# EAGLE board CT_schematic (EAGLE 7.6.0)

Size 100 x 80 mm. Coordinates in mm from the lower left corner, seen from the top.
Outline: 0,0 100,0 100,80 0,80 0,0
Copper layers (1*16): Top 0.035mm / dielectric 1.5mm / Bottom 0.035mm
Design rules "default": minimum track width 10mil, minimum drill 24mil, track to track 8mil, track to pad 8mil, pad to pad 8mil, via to via 8mil, smd to smd 8mil, copper to edge 40mil, drill to drill 8mil, minimum pad ring 10mil, minimum via ring 8mil, stop-mask expansion 4mil, vias tented up to drill 0mil, thermal gap 10mil

## Footprints (pad centres in the part's own frame; a part is rotated, then mirrored left to right if it is on the bottom)
C0603 = smd 0.8 x 0.8: 1 -0.762,0; 2 0.762,0
C0402 = smd 0.5 x 0.5: 1 -0.508,0; 2 0.508,0
C1210 = smd 1.2 x 2.5: 1 -1.524,0; 2 1.524,0
EXV-9H = smd 3.505 x 1.676: 1 -2.857,0; 2 2.857,0
L0603 = smd 0.8 x 0.8: 1 -0.762,0; 2 0.762,0
PJ-037B_PACKAGE = drill 3.7 square: 1 12,0 | drill 3.2 square: 2 6,0
R0603 = smd 0.8 x 0.8: 1 -0.762,0; 2 0.762,0
LQFP48 = smd 0.3 x 1.2: 1 -2.75,-4.25; 2 -2.25,-4.25; 3 -1.75,-4.25; 4 -1.25,-4.25; 5 -0.75,-4.25; 6 -0.25,-4.25; 7 0.25,-4.25; 8 0.75,-4.25; 9 1.25,-4.25; 10 1.75,-4.25; 11 2.25,-4.25; 12 2.75,-4.25; 25 2.75,4.25; 26 2.25,4.25; 27 1.75,4.25; 28 1.25,4.25; 29 0.75,4.25; 30 0.25,4.25; 31 -0.25,4.25; 32 -0.75,4.25; 33 -1.25,4.25; 34 -1.75,4.25; 35 -2.25,4.25; 36 -2.75,4.25 | smd 1.2 x 0.3: 13 4.25,-2.75; 14 4.25,-2.25; 15 4.25,-1.75; 16 4.25,-1.25; 17 4.25,-0.75; 18 4.25,-0.25; 19 4.25,0.25; 20 4.25,0.75; 21 4.25,1.25; 22 4.25,1.75; 23 4.25,2.25; 24 4.25,2.75; 37 -4.25,2.75; 38 -4.25,2.25; 39 -4.25,1.75; 40 -4.25,1.25; 41 -4.25,0.75; 42 -4.25,0.25; 43 -4.25,-0.25; 44 -4.25,-0.75; 45 -4.25,-1.25; 46 -4.25,-1.75; 47 -4.25,-2.25; 48 -4.25,-2.75
SOIC-8 = smd 1.6 x 0.6: 1 -2.7,1.905 | smd 1.55 x 0.6: 2 -2.7,0.635; 3 -2.7,-0.635; 4 -2.7,-1.905; 5 2.7,-1.905; 6 2.7,-0.635; 7 2.7,0.635; 8 2.7,1.905
LGA63S127P16X13_2050X1750X150 = smd 0.9 x 0.9: 1 -9.525,-8.05; 2 -8.255,-8.05; 3 -6.985,-8.05; 4 -5.715,-8.05; 5 -4.445,-8.05; 6 -3.175,-8.05; 7 -1.905,-8.05; 8 -0.635,-8.05; 9 0.635,-8.05; 10 1.905,-8.05; 11 3.175,-8.05; 12 4.445,-8.05; 13 5.715,-8.05; 14 6.985,-8.05; 15 8.255,-8.05; 16 9.525,-8.05; 17 9.525,-6.35; 18 9.525,-5.08; 19 9.525,-3.81; 20 9.525,-2.54; 21 9.525,-1.27; 22 9.525,0; 23 9.525,1.27; 24 9.525,2.54; 25 9.525,3.81; 26 9.525,5.08; 27 9.525,6.35; 28 9.525,8.05; 29 8.255,8.05; 30 6.985,8.05; 31 5.715,8.05; 32 4.445,8.05; 33 3.175,8.05; 34 1.905,8.05; 35 0.635,8.05; 36 -0.635,8.05; 37 -1.905,8.05; 38 -3.175,8.05; 39 -4.445,8.05; 40 -5.715,8.05; 41 -6.985,8.05; 42 -8.255,8.05; 43 -9.525,8.05; 44 -9.525,6.35; 45 -9.525,5.08; 46 -9.525,3.81; 47 -9.525,2.54; 48 -9.525,1.27; 49 -9.525,0; 50 -9.525,-1.27; 51 -9.525,-2.54; 52 -9.525,-3.81; 53 -9.525,-5.08; 54 -9.525,-6.35 | smd 2.2 x 2.2: 55 -4.5,-4.5; 56 -1.5,-4.5; 57 1.5,-4.5; 58 -4.5,-1.5; 59 -1.5,-1.5; 60 1.5,-1.5; 61 -4.5,1.5; 62 -1.5,1.5; 63 1.5,1.5
COAXIAL_C = smd 1 x 1: 1 0,-1.5; 2 0,1.5 | smd 1.05 x 2.2: 3 -1.475,0; 4 1.475,0
SAMTEC_FTSH-105-01-L-DV-K = smd 0.762 x 2.794: 1 -2.54,-2.032; 2 -2.54,2.032; 3 -1.27,-2.032; 4 -1.27,2.032; 5 0,-2.032; 6 0,2.032; 7 1.27,-2.032; 8 1.27,2.032; 9 2.54,-2.032; 10 2.54,2.032
MICRO_USB_AB = smd 0.4 x 1.35: 1 1.3,0.26; 2 0.65,0.26; 3 0,0.26; 4 -0.65,0.26; 5 -1.3,0.26 | drill 0.6 pad 0.95 long: 6 4.175,-2.54; 7 -4.175,-2.54 | drill 0.7 pad 1.1 long: 8 -2.225,0.46; 9 2.225,0.46
SOT143B = smd 1 x 0.7: 1 -0.75,-1 | smd 0.6 x 0.7: 2 0.95,-1; 3 0.95,1; 4 -0.95,1
ABS07-32.768KHZ-7-T = smd 1.1 x 2.4: 1 -2.5,0; 2 0,0
ABLS-25.000MHZ-B2F-T = smd 5.6 x 2.8: 1 -3.81,0; 2 5.69,0
WSON-8 = smd 0.3 x 0.6: 1 -0.75,0; 2 0.05,0; 3 0.85,0; 4 1.65,0; 5 1.65,3.8; 6 0.85,3.8; 7 0.05,3.8; 8 -0.75,3.8 | smd 3 x 2.6: PAD 0.45,1.9
SON-6 = smd 0.55 x 0.3: 1 -0.355,0.5 | smd 0.52 x 0.3: 2 -0.37,0; 3 -0.37,-0.5; 4 0.37,-0.5; 5 0.37,0; 6 0.37,0.5
SW_4-1437565-2 = smd 1.4 x 2.1: 1 -2.23,4.55; 2 -2.23,-4.55; 3 2.23,4.55; 4 2.23,-4.55
LGM67K-G1J2-24-Z = smd 0.8 x 1.4: A -2,0; C 0,0
NC7SZ125M5X = smd 1.3 x 0.7: 1 -1.3,0.95; 2 -1.3,0; 3 -1.3,-0.95; 4 1.3,-0.95; 5 1.3,0.95

## Placement (x,y rotation side)
C1  1e-07  [C0603]  -33.02,72.39 0 top  (outside the outline)
C2  1e-07  [C0603]  -36.83,72.39 0 top  (outside the outline)
C3  1e-07  [C0603]  -40.64,72.39 0 top  (outside the outline)
C4  1e-07  [C0603]  -44.45,72.39 0 top  (outside the outline)
C5  4.7e-06  [C0603]  -29.21,72.39 0 top  (outside the outline)
C6  1e-07  [C0603]  -48.26,72.39 0 top  (outside the outline)
C7  1e-08  [C0603]  -52.07,72.39 0 top  (outside the outline)
C8  1e-06  [C0603]  -55.88,72.39 0 top  (outside the outline)
C9  1e-11  [C0402]  -50.8,77.47 0 top  (outside the outline)
C10  1e-11  [C0402]  -54.61,77.47 0 top  (outside the outline)
C11  1e-11  [C0402]  -58.42,77.47 0 top  (outside the outline)
C12  1e-11  [C0402]  -62.23,77.47 0 top  (outside the outline)
C13  1e-08  [C0402]  -66.04,77.47 0 top  (outside the outline)
C14  1e-12  [C0402]  -69.85,77.47 0 top  (outside the outline)
C15  2.2e-05  [C1210]  -48.26,59.69 0 top  (outside the outline)
C16  1e-07  [C0402]  -73.66,77.47 0 top  (outside the outline)
C17  1e-07  [C0402]  -15.24,82.55 0 top  (outside the outline)
C18  1e-07  [C0402]  -19.05,82.55 0 top  (outside the outline)
C19  1e-08  [C0402]  -22.86,82.55 0 top  (outside the outline)
C20  1e-05  [C1210]  -54.61,59.69 0 top  (outside the outline)
C21  1e-05  [C1210]  -60.96,59.69 0 top  (outside the outline)
C22  1e-07  [C0402]  -26.67,82.55 0 top  (outside the outline)
C23  0.0001  [EXV-9H]  -29.21,50.8 0 top  (outside the outline)
C24  0.0001  [EXV-9H]  -40.64,50.8 0 top  (outside the outline)
C25  1e-08  [C0402]  -30.48,82.55 0 top  (outside the outline)
C26  1e-08  [C0402]  -34.29,82.55 0 top  (outside the outline)
C27  1e-08  [C0402]  -38.1,82.55 0 top  (outside the outline)
F1  240.0  [L0603]  -59.69,72.39 0 top  (outside the outline)
I1  3.6e-09  [C0402]  -46.99,77.47 0 top  (outside the outline)
J1  PJ-037B  [PJ-037B_PACKAGE]  -27.94,29.21 0 top  (outside the outline)
R1  10000.0  [R0603]  -41.91,66.04 0 top  (outside the outline)
R2  1000.0  [R0603]  -63.5,72.39 0 top  (outside the outline)
R3  1600.5  [R0603]  -67.31,72.39 0 top  (outside the outline)
R4  4700.0  [R0603]  -71.12,72.39 0 top  (outside the outline)
R5  4700.0  [R0603]  -15.24,77.47 0 top  (outside the outline)
R6  2200.0  [R0603]  -19.05,77.47 0 top  (outside the outline)
R7  2200.0  [R0603]  -22.86,77.47 0 top  (outside the outline)
R8  10000.0  [R0603]  -46.99,66.04 0 top  (outside the outline)
R9  10000.0  [R0603]  -52.07,66.04 0 top  (outside the outline)
R10  10000.0  [R0603]  -57.15,66.04 0 top  (outside the outline)
R11  10000.0  [R0603]  -62.23,66.04 0 top  (outside the outline)
R12  100000.0  [R0603]  -21.59,66.04 0 top  (outside the outline)
R13  2700.0  [R0603]  -26.67,77.47 0 top  (outside the outline)
R14  10000.0  [R0603]  -67.31,66.04 0 top  (outside the outline)
R15  10000.0  [R0603]  -72.39,66.04 0 top  (outside the outline)
R16  10000.0  [R0603]  -15.24,72.39 0 top  (outside the outline)
R17  5.0  [R0603]  -30.48,77.47 0 top  (outside the outline)
R18  100000.0  [R0603]  -26.67,66.04 0 top  (outside the outline)
R19  2231.0  [R0603]  -34.29,77.47 0 top  (outside the outline)
R20  1000.0  [R0603]  -38.1,77.47 0 top  (outside the outline)
R21  10000.0  [R0603]  -20.32,72.39 0 top  (outside the outline)
R22  10000.0  [R0603]  -25.4,72.39 0 top  (outside the outline)
R23  9100.0  [R0603]  -41.91,77.47 0 top  (outside the outline)
R24  680000.0  [R0603]  -31.75,66.04 0 top  (outside the outline)
R25  120000.0  [R0603]  -36.83,66.04 0 top  (outside the outline)
U1  STM32L151C6T6A  [LQFP48]  -25.4,41.91 0 top  (outside the outline)
U2  AT25128B-SSHL-T  [SOIC-8]  -41.91,40.64 0 top  (outside the outline)
U3  CC3200MODR1M2AMOBT  [LGA63S127P16X13_2050X1750X150]  -25.4,11.43 0 top  (outside the outline)
U4  73412-0114  [COAXIAL_C]  -21.59,52.07 0 top  (outside the outline)
U5  FTSH-105-01-L-DV-K  [SAMTEC_FTSH-105-01-L-DV-K]  -60.96,7.62 0 top  (outside the outline)
U6  47590-0001  [MICRO_USB_AB]  -36.83,30.48 0 top  (outside the outline)
U7  prtr5v0u2ax  [SOT143B]  -50.8,82.55 0 top  (outside the outline)
U8  ABS07-32.768KHZ-7-T  [ABS07-32.768KHZ-7-T]  -27.94,59.69 0 top  (outside the outline)
U9  ABLS-25.000MHZ-B2F-T  [ABLS-25.000MHZ-B2F-T]  -59.69,50.8 0 top  (outside the outline)
U10  LP3878SDX-ADJ/NOPB  [WSON-8]  -63.5,39.37 0 top  (outside the outline)
U11  TPS3895ADRYR  [SON-6]  -54.61,81.28 0 top  (outside the outline)
U12  4-1437565-2  [SW_4-1437565-2]  -57.15,29.21 0 top  (outside the outline)
U13  Q65110A2395  [LGM67K-G1J2-24-Z]  -36.83,59.69 0 top  (outside the outline)
U14  nc7sz125m5x  [NC7SZ125M5X]  -66.04,58.42 0 top  (outside the outline)
U15  nc7sz125m5x  [NC7SZ125M5X]  -72.39,58.42 0 top  (outside the outline)
U16  nc7sz125m5x  [NC7SZ125M5X]  -15.24,66.04 0 top  (outside the outline)

## Library data of the parts
C1-C27 F1 I1 J1 R1-R25 U1-U16 = circuit_tree

## Nets
CLK_CRYSTAL_U1_3: C9.1 U1.3 U8.1
CLK_CRYSTAL_U1_4: C10.1 U1.4 U8.2
CLK_CRYSTAL_U1_5: C11.1 U1.5 U9.1
CLK_CRYSTAL_U1_6: C12.1 U1.6 U9.2
GND: C1.2 C2.2 C3.2 C4.2 C5.2 C6.2 C7.2 C8.2 C9.2 C10.2 C11.2 C12.2 C13.2 C14.2 C15.2 C16.2 C17.2 C18.2 C19.2 C20.2 C21.2 C22.2 C23.2 C24.2 C25.2 C26.2 C27.2 J1.2 R2.2 R8.2 R12.2 R13.2 R17.2 R20.2 R23.2 R25.2 U1.8 U1.23 U1.35 U1.47 U2.4 U3.1 U3.2 U3.16 U3.27 U3.28 U3.30 U3.32 U3.38 U3.43 U3.55 U3.56 U3.57 U3.58 U3.59 U3.60 U3.61 U3.62 U3.63 U4.1 U4.2 U4.3 U4.4 U5.3 U5.5 U6.5 U6.6 U6.7 U6.8 U6.9 U7.1 U10.3 U10.PAD U11.2 U13.C U14.2 U14.3 U15.1 U15.3 U16.1 U16.3
NET_U1_1: C6.1 U1.1
NET_U1_7: R5.1 U1.7 U16.4
NET_U1_9: C7.1 C8.1 F1.1 U1.9
NET_U1_42: R6.1 U1.42 U3.3
NET_U1_43: R7.1 U1.43 U3.4
NET_U1_44: R8.1 U1.44
NET_U1_45: R3.1 U1.45 U13.A
NET_U1_46: R1.1 U1.46 U12.3 U12.4
NET_U2_3: R9.1 U2.3
NET_U2_7: R11.1 U2.7
NET_U3_21: R12.1 U3.21
NET_U3_23: R13.1 U3.23
NET_U3_35: R4.1 U3.35 U15.4
NET_U4_1: C14.1 I1.1 U4.1
NET_U4_31: I1.2
NET_U5_9: R17.1 U5.9
NET_U7_4: U6.1 U7.4
NET_U10_1: C19.1 U10.1
NET_U10_6: R19.2 R20.1 U10.6
NET_U10_8: R18.1 U10.8
NET_U11_1: R22.1 R23.1 U11.1
NET_U11_3: R24.2 R25.1 U11.3
NET_U11_4: R21.1 U11.4 U14.4 U15.2 U16.2
NET_U12_1: R2.1 U12.1 U12.2
PROC_SPI1_MISO: U1.16 U2.2
PROC_SPI1_MOSI: U1.17 U2.5
PROC_SPI1_NSS: R10.1 U1.14 U2.1
PROC_SPI1_SCK: U1.15 U2.6
PROC_SYS_JTCK_SWCLK: R15.1 U1.37 U5.4
PROC_SYS_JTDO_TRACESWO: U1.39 U5.6
PROC_SYS_JTMS_SWDIO: R16.1 U1.34 U5.2
PROC_USB_DM: U1.32 U6.2 U7.3
PROC_USB_DP: U1.33 U6.3 U7.2
RST_OUT_U5_JTAG_RST_B: R14.1 U5.10 U14.1
VCC_S1_11V8: C20.1 C23.1 C24.1 J1.1 R18.2 U10.4
VCC_TIER1_3V3: C1.1 C2.1 C3.1 C4.1 C5.1 C13.1 C15.1 C16.1 C17.1 C18.1 C21.1 C22.1 C25.1 C26.1 C27.1 F1.2 R1.2 R3.2 R4.2 R5.2 R6.2 R7.2 R9.2 R10.2 R11.2 R14.2 R15.2 R16.2 R19.1 R21.2 R22.2 R24.1 U1.24 U1.36 U1.48 U2.8 U3.36 U3.37 U3.40 U5.1 U10.5 U11.6 U14.5 U15.5 U16.5

## Tracks (layer width: path | path; a pad name or v marks a point on that pad's centre or on a via)
CLK_CRYSTAL_U1_3  (2 unrouted)
CLK_CRYSTAL_U1_4  (2 unrouted)
CLK_CRYSTAL_U1_5  (2 unrouted)
CLK_CRYSTAL_U1_6  (2 unrouted)
GND  (80 unrouted)
NET_U1_1  (1 unrouted)
NET_U1_7  (2 unrouted)
NET_U1_9  (3 unrouted)
NET_U1_42  (2 unrouted)
NET_U1_43  (2 unrouted)
NET_U1_44  (1 unrouted)
NET_U1_45  (2 unrouted)
NET_U1_46  (3 unrouted)
NET_U2_3  (1 unrouted)
NET_U2_7  (1 unrouted)
NET_U3_21  (1 unrouted)
NET_U3_23  (1 unrouted)
NET_U3_35  (2 unrouted)
NET_U4_1  (2 unrouted)
NET_U5_9  (1 unrouted)
NET_U7_4  (1 unrouted)
NET_U10_1  (1 unrouted)
NET_U10_6  (2 unrouted)
NET_U10_8  (1 unrouted)
NET_U11_1  (2 unrouted)
NET_U11_3  (2 unrouted)
NET_U11_4  (4 unrouted)
NET_U12_1  (2 unrouted)
PROC_SPI1_MISO  (1 unrouted)
PROC_SPI1_MOSI  (1 unrouted)
PROC_SPI1_NSS  (2 unrouted)
PROC_SPI1_SCK  (1 unrouted)
PROC_SYS_JTCK_SWCLK  (2 unrouted)
PROC_SYS_JTDO_TRACESWO  (1 unrouted)
PROC_SYS_JTMS_SWDIO  (2 unrouted)
PROC_USB_DM  (2 unrouted)
PROC_USB_DP  (2 unrouted)
RST_OUT_U5_JTAG_RST_B  (2 unrouted)
VCC_S1_11V8  (5 unrouted)
VCC_TIER1_3V3  (44 unrouted)